# Altium PCB chassisPCB.PcbDoc
Units mil, origin at the board's own origin, x right, y up, seen from the top; angles counter-clockwise.
Board outline 1440 x 1445 mil, 4 copper layers (Top Layer, Layer 1, Layer 2, Bottom Layer), stack 23.712 mil thick; 17 components, 23 nets, 100 pads, 21 vias.
Unrouted connection lines stored in the file: 6.
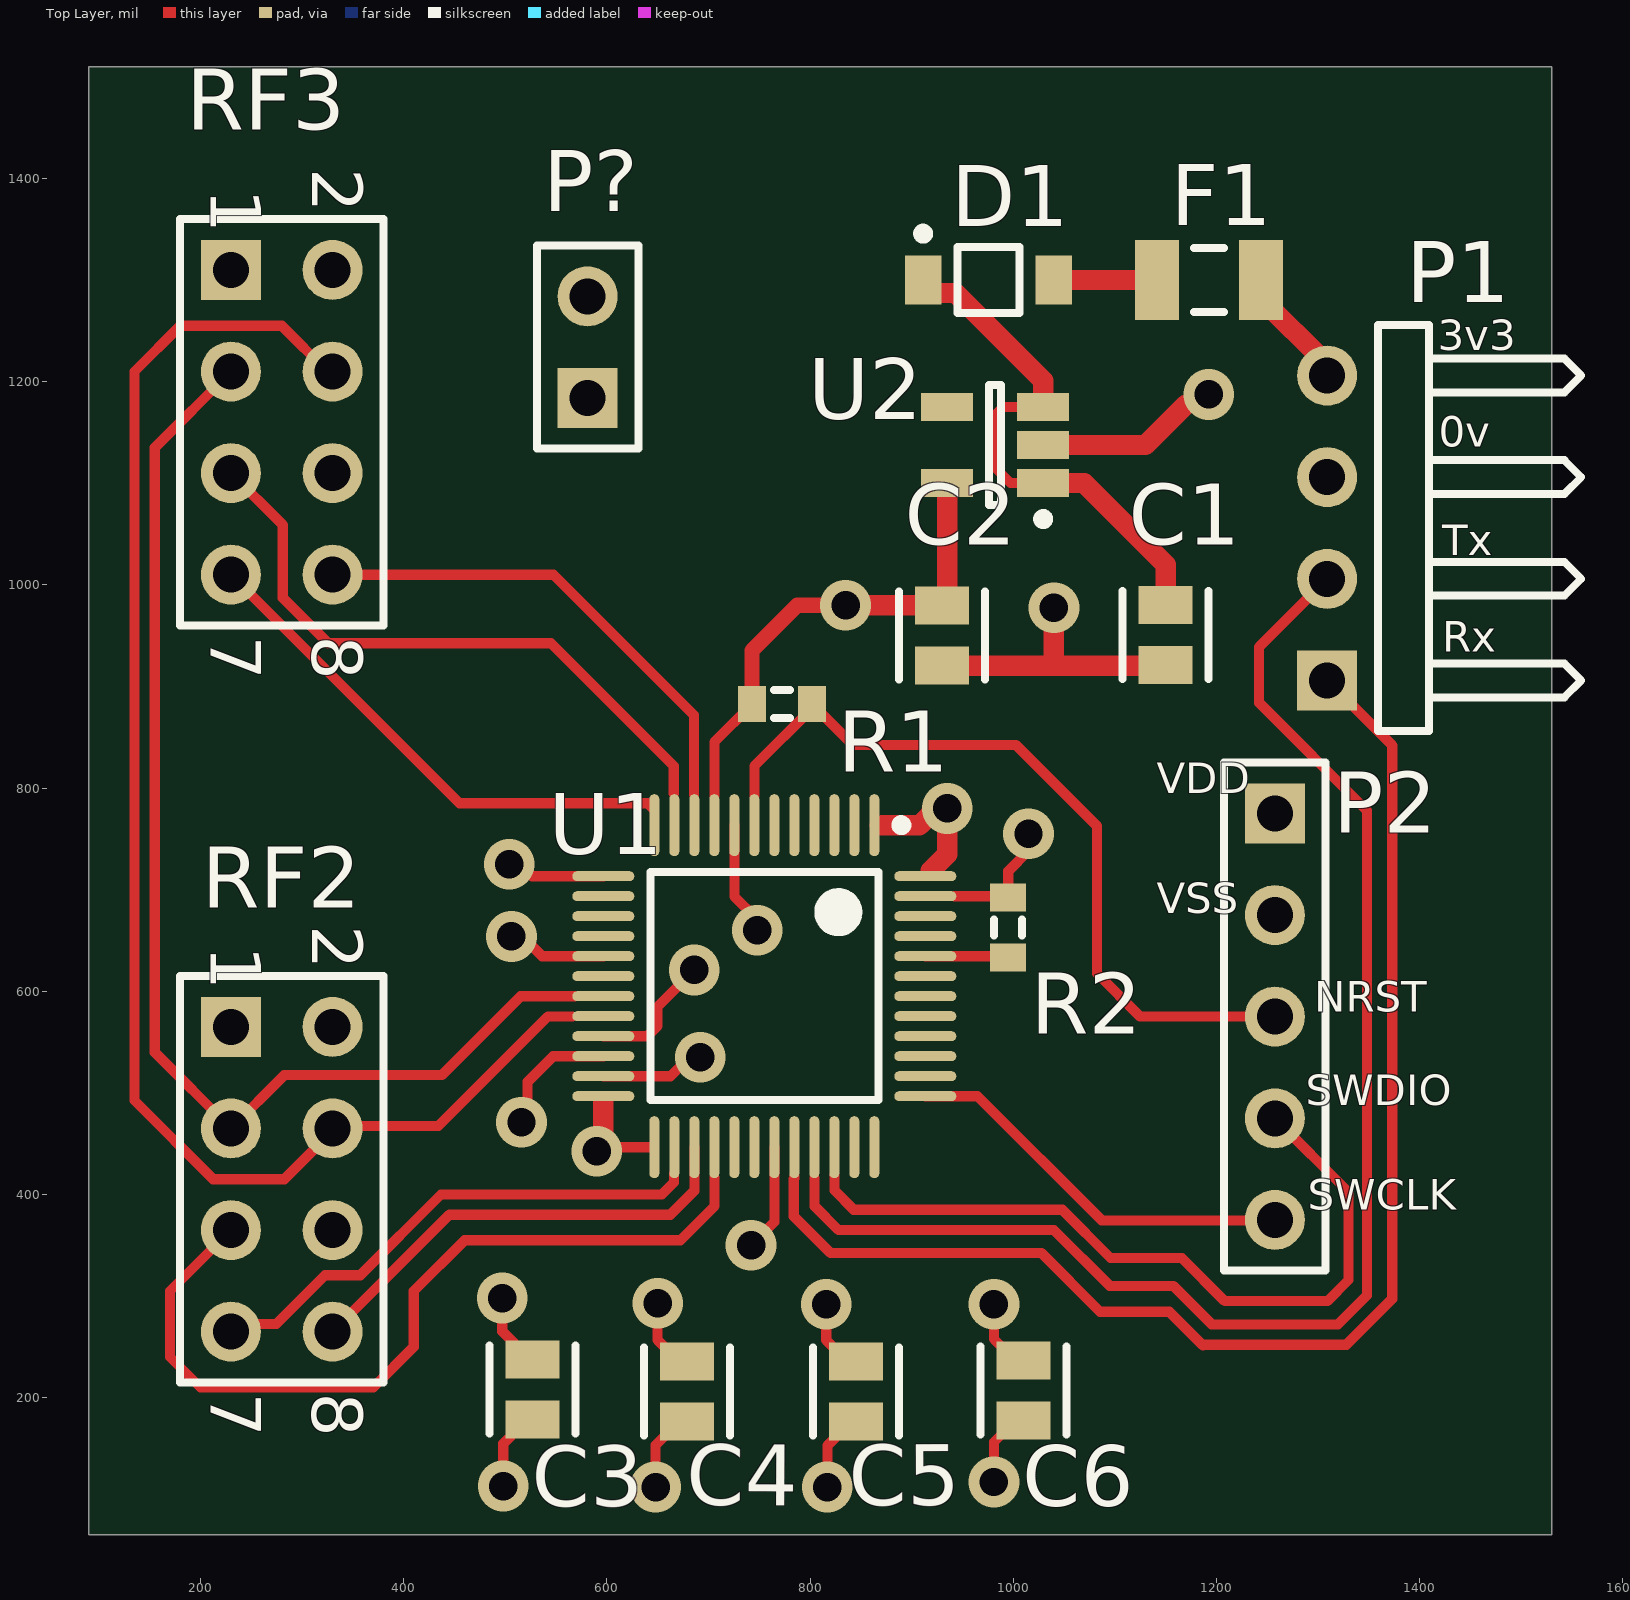
[diagram p0: Top Layer view]
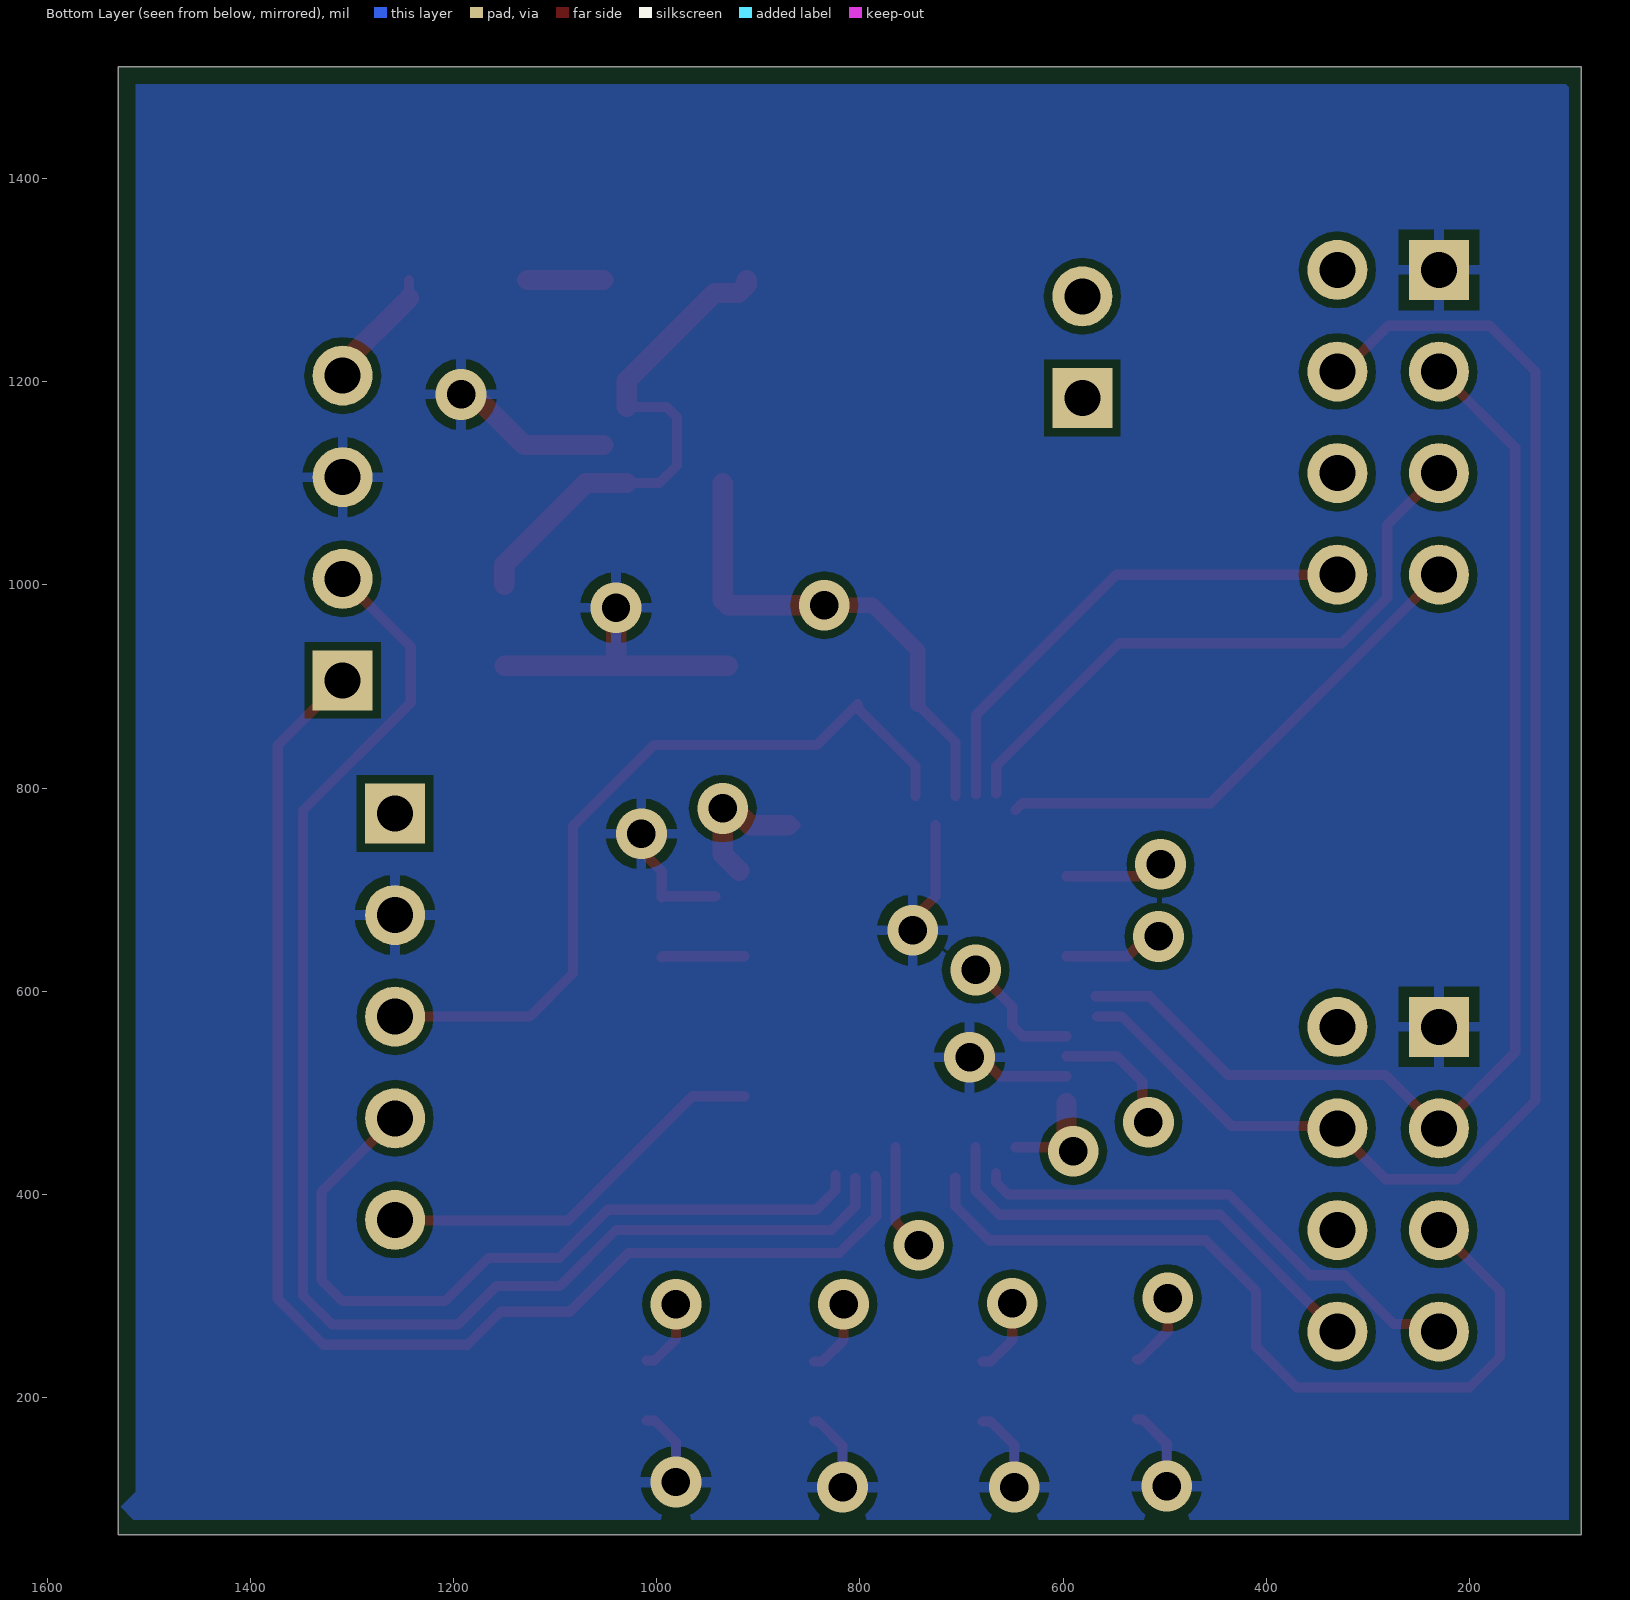
[diagram p1: Bottom Layer view, seen from below]
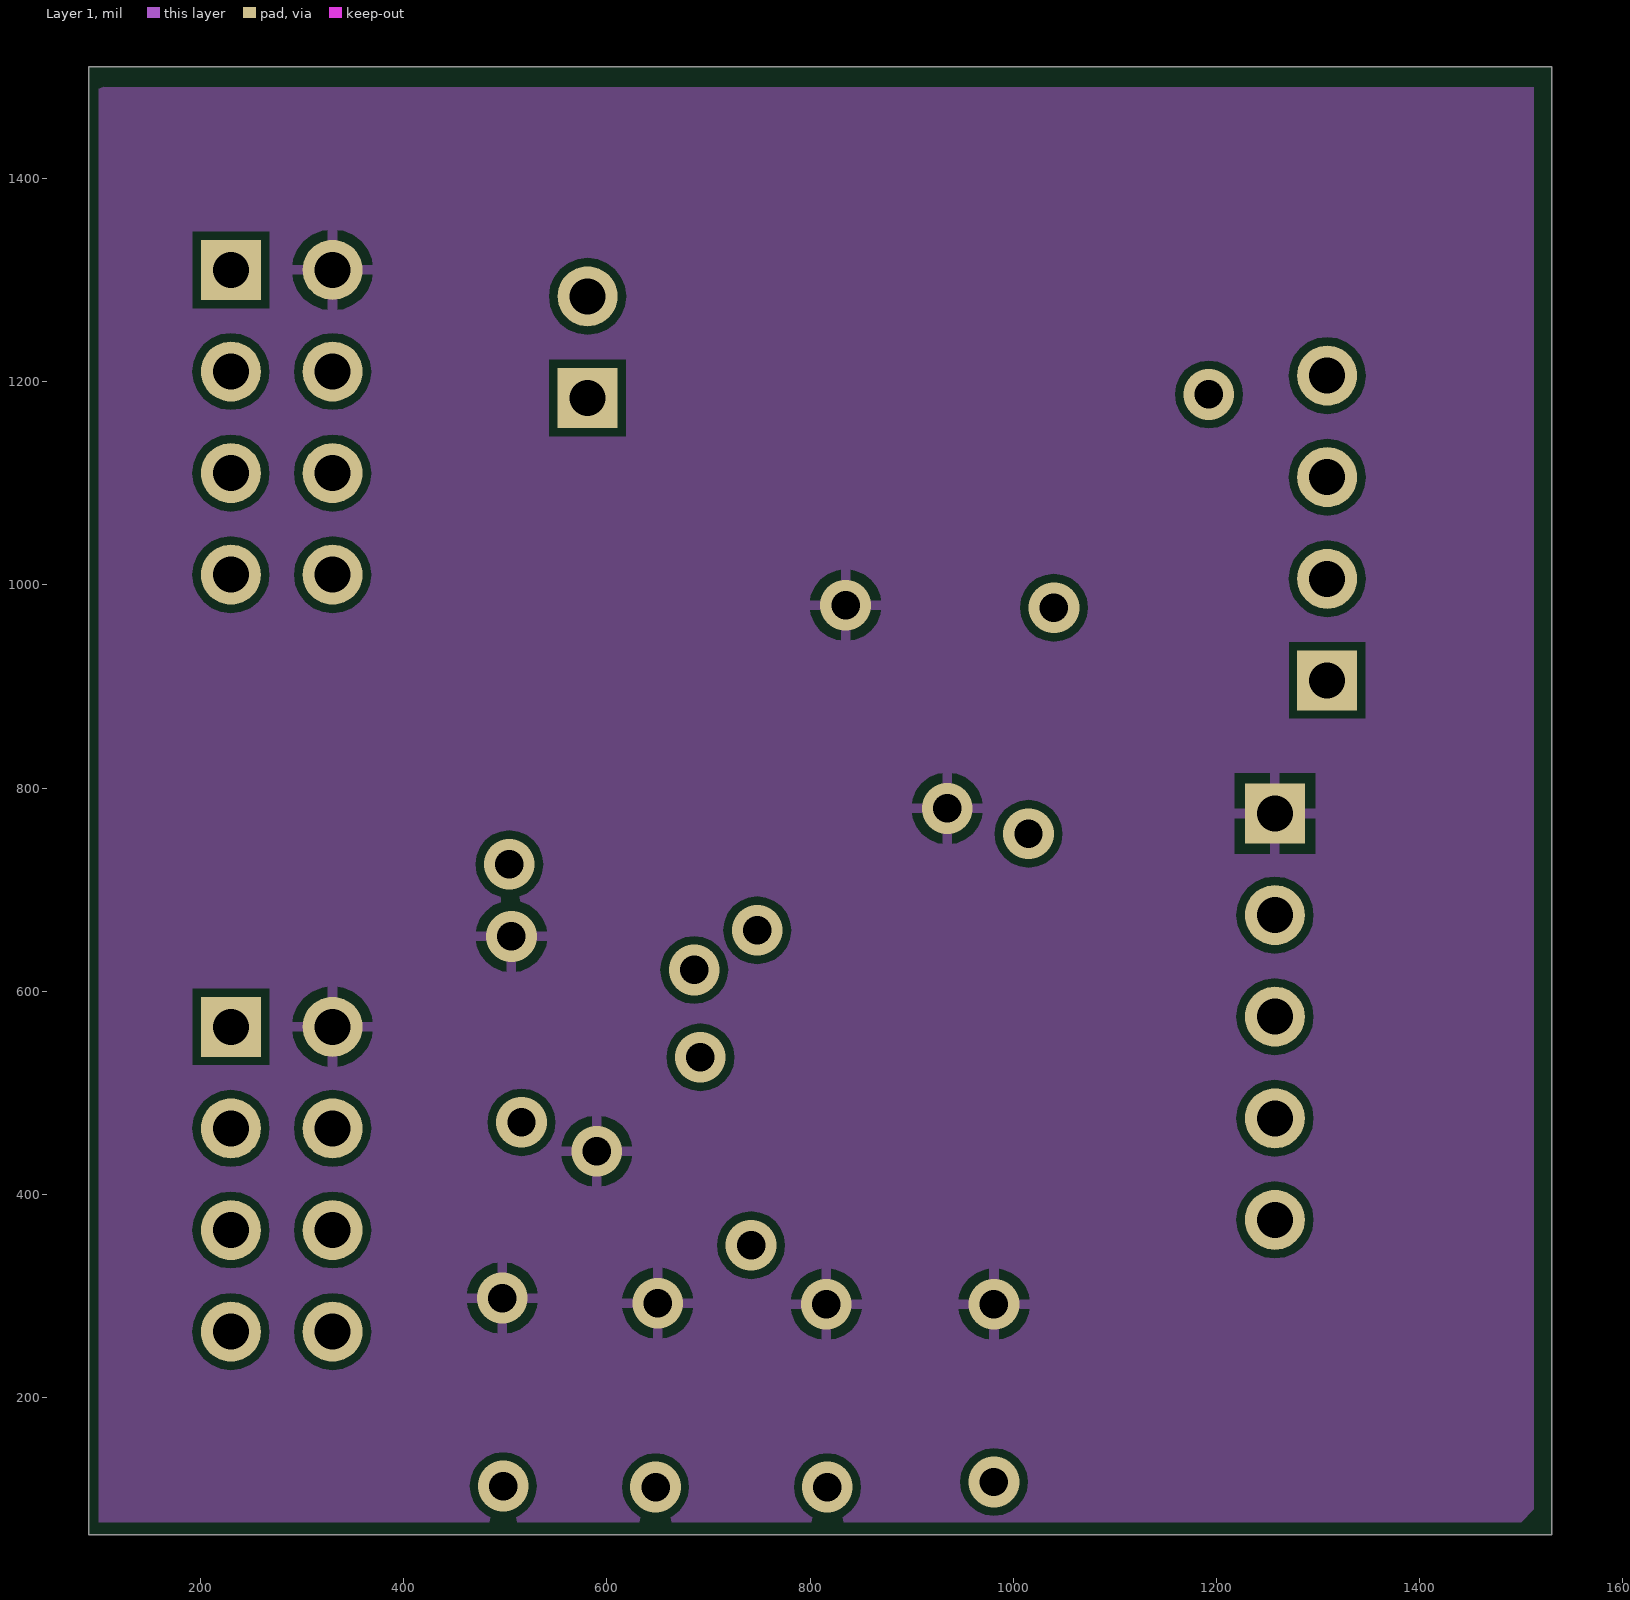
[diagram p2: Layer 1]
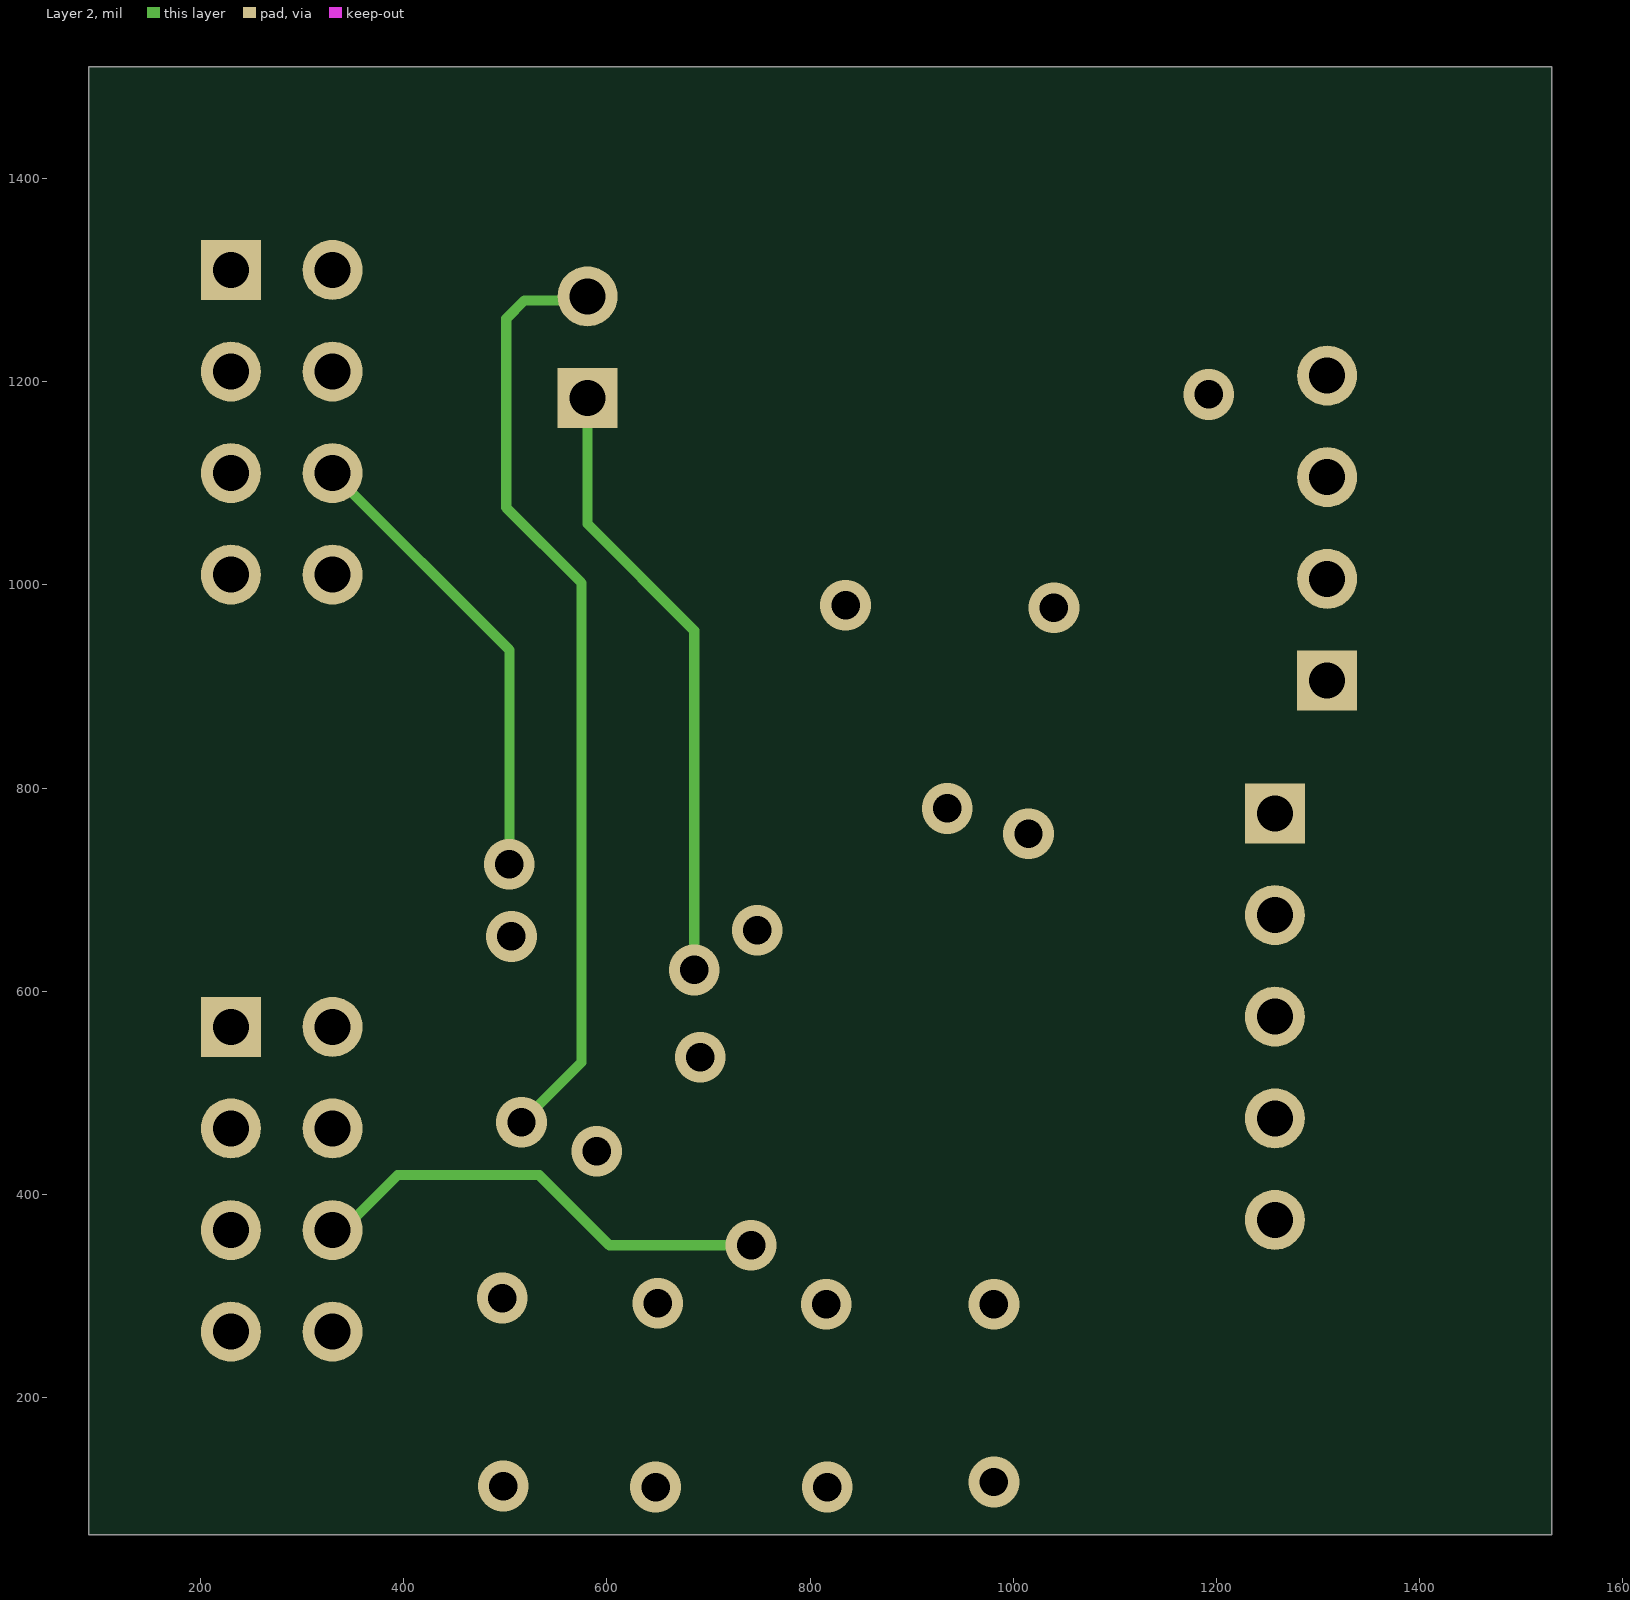
[diagram p3: Layer 2]

## Layer stack, top to bottom
Top Solder: solder mask 0.4, Solder Resist, Dk 3.5
Top Layer: signal copper 1.378
Dielectric 2: prepreg 2.8, PP-006, Dk 4.1
Layer 1: signal copper 1.378
Dielectric 1: dielectric 12.6, FR-4, Dk 4.8
Layer 2: signal copper 1.378
Dielectric 3: prepreg 2.8, PP-006, Dk 4.1
Bottom Layer: signal copper 1.378
Bottom Solder: solder mask 0.4, Solder Resist, Dk 3.5

## Board outline
90,65 1530,65 1530,1510 90,1510

## Design rules (kind name [scope] priority, off if disabled: settings)
Clearance [All] p1: gap=8 ignorepadtopadclearanceinfootprint=TRUE except(0: Arc-Text Arc-Hole Track-Text Track-Hole SMDPad-Text SMDPad-Hole THPad-Text THPad-Hole Via-Text Via-Hole Fill-Text Fill-Hole Poly-Text Poly-Hole Region-Text Region-Hole Text-Text Text-Hole; 7: SMDPad-SMDPad)
MinimumSolderMaskSliver [All] p1: minsoldermaskwidth=5
PolygonConnect [All] p1: connectstyle=Relief reliefconductorwidth=10 reliefentries=4 polygonreliefangle="90 Angle" airgapwidth=10
RoutingVias [All] p1: holewidth=28 width=50 viastyle="Through Hole" minholewidth=28 minwidth=50 maxholewidth=28 maxwidth=50
SilkToSilkClearance [HasFootprint('No Footprint') vs HasFootprint('No Footprint')] p1: silktosilkclearance=0
SilkToSolderMaskClearance [IsPad vs HasFootprint('STM-LQFP48_L')] p1: minsilkscreentomaskgap=10 clearancetoexposedcopper=TRUE
SolderMaskExpansion [All] p1: expansion=2 istentingtop=FALSE
Width [All] p1: maxlimit=20 minlimit=10 preferedwidth=10 midlayer1_maxwidth=10 midlayer2_maxwidth=10 bottomlayer_maxwidth=10 minimp=50.000000 maximp=50.000000 favimp=50.000000
27 further rules are at their usual default settings.

## Components (designator, comment, footprint, x,y, rotation, side; value= is the part's Value field where it differs from the comment)
C1 "1uF" FP-C0805C-DN-MFG 1150,950.47 r270 top value="0.22 μF"
C2 "1uF" FP-C0805C-DN-MFG 930,950 r270 top value="0.22 μF"
C3 "4.7uF" FP-C0805C-DN-MFG 527,208 r270 top value="0.22 μF"
C4 "10nF" FP-C0805C-DN-MFG 679,206 r270 top value="0.22 μF"
C5 "10nF" FP-C0805C-DN-MFG 845,206 r270 top value="0.22 μF"
C6 "10nF" FP-C0805C-DN-MFG 1010,207 r270 top value="0.22 μF"
D1 "MBR120VLSFT1" ONSC-SOD-123FL-2-498-01_V 975.63,1300 r0 top
F1 "3413.0330.22" FP-3413_0330_22-MFG 1192.5,1300 r180 top value=3.5mΩ
P1 "Ext-Con" HDR1X4H 1309,906 r90 top
P2 "Header 5" HDR1X5 1257.5,775 r270 top
P? "Header 2" HDR1X2 581,1184 r90 top
R1 "Res3" J1-0603 772.5,882.5 r0 top value=10k
R2 "Res3" J1-0603 995,662.97 r90 top value=10k
RF2 "nRF24-Con" HDR2X4 230,565 r270 top
RF3 "nR24-Con" HDR2X4 230,1310 r270 top
U1 "STM32F373CCT6" STM-LQFP48_L 755,605 r270 top
U2 "LD39015M33R" SOT23-5L_M 982.24,1137.6 r180 top

## Footprints (in the part's own frame and the unit in brackets; to place one, negate y for a bottom-side part, rotate by r counter-clockwise, add the part's x,y. Pads: shape width x height; smd on the part's side, far side on the other; paste and mask are expansions set on the pad)
FP-3413_0330_22-MFG [mm]
  rect 1.1x2 smd paste+0 mask+0: 1(-1.3,0) 2(1.3,0)
  silkscreen extent -0.38,-0.8 0.38,0.8, body extent -1.95,-1.1 1.95,1.1, height 0.25
FP-C0805C-DN-MFG [mm]
  rect 0.95x1.35 smd paste+0 mask+0: 1(-0.75,0) 2(0.75,0)
  silkscreen extent -1.1,-1.07 1.1,1.07, body extent -1.4,-0.85 1.4,0.85, height 0.25
HDR1X2 [mm] "Connector; Header; 2 Position"
  rect 1.5x1.5 hole 0.9: 1(0,0)
  round 1.5 hole 0.9: 2(2.54,0)
  silkscreen extent -1.27,-1.27 3.81,1.27
HDR1X4H [mm] "Connector; Header; 4 Position; Right Angle"
  rect 1.5x1.5 hole 0.9: 1(0,0)
  round 1.5 hole 0.9: 2(2.54,0) 3(5.08,0) 4(7.62,0)
  silkscreen extent -1.27,-6.35 8.89,-1.27
HDR1X5 [mm] "Connector; Header; 5 Position"
  rect 1.5x1.5 hole 0.9: 1(0,0)
  round 1.5 hole 0.9: 2(2.54,0) 3(5.08,0) 4(7.62,0) 5(10.16,0)
  silkscreen extent -1.27,-1.27 11.43,1.27
HDR2X4 [mm] "Connector; Header; 4x2 Position"
  rect 1.5x1.5 hole 0.9: 1(0,0)
  round 1.5 hole 0.9: 2(0,2.54) 3(2.54,0) 4(2.54,2.54) 5(5.08,0) 6(5.08,2.54) 7(7.62,0) 8(7.62,2.54)
  silkscreen extent -1.27,-1.27 8.89,3.81
J1-0603 [mm] "Chip Resistor, Body 1.6x0.8mm, IPC High Density"
  rect 0.7x0.9 smd: 1(-0.75,0) 2(0.75,0)
  silkscreen extent -0.2,-0.35 0.2,0.35, body extent -0.85,-0.48 0.85,0.48, height 0.9
ONSC-SOD-123FL-2-498-01_V [mm] "SOD, 2-Leads, Body 2.7x1.65mm"
  rect 0.91x1.22 smd: 1(-1.635,0) 2(1.635,0)
  silkscreen extent -1.76,-0.82 0.78,1.28, body extent -1.35,-0.82 1.35,0.82, height 1
SOT23-5L_M [mm] "SOT23, 5-Leads, Body 2.9x1.6mm, Pitch 0.95mm, Lead Span 2.8mm, IPC Low Density"
  rect 1.3x0.7 smd: 1(-1.2,0.95) 2(-1.2,0) 3(-1.2,-0.95) 4(1.2,-0.95) 5(1.2,0.95)
  silkscreen extent -1.33,-1.5 0.15,1.97, body extent -0.87,-1.5 0.87,1.5, height 1.45
STM-LQFP48_L [mm] "QFP, 48-Leads, Body 7x7mm, Pitch 0.5mm, IPC High Density"
  oval 1.55x0.25 smd: 1(-4.025,2.75) 2(-4.025,2.25) 3(-4.025,1.75) 4(-4.025,1.25) 5(-4.025,0.75) 6(-4.025,0.25) 7(-4.025,-0.25) 8(-4.025,-0.75) 9(-4.025,-1.25) 10(-4.025,-1.75) 11(-4.025,-2.25) 12(-4.025,-2.75) 25(4.025,-2.75) 26(4.025,-2.25) 27(4.025,-1.75) 28(4.025,-1.25) 29(4.025,-0.75) 30(4.025,-0.25) 31(4.025,0.25) 32(4.025,0.75) 33(4.025,1.25) 35(4.025,2.25) 36(4.025,2.75) ""(4.025,1.75)
  oval 0.25x1.55 smd: 13(-2.75,-4.025) 14(-2.25,-4.025) 15(-1.75,-4.025) 16(-1.25,-4.025) 17(-0.75,-4.025) 18(-0.25,-4.025) 19(0.25,-4.025) 20(0.75,-4.025) 21(1.25,-4.025) 22(1.75,-4.025) 23(2.25,-4.025) 24(2.75,-4.025) 37(2.75,4.025) 38(2.25,4.025) 39(1.75,4.025) 40(1.25,4.025) 41(0.75,4.025) 42(0.25,4.025) 43(-0.25,4.025) 44(-0.75,4.025) 45(-1.25,4.025) 46(-1.75,4.025) 47(-2.25,4.025) 48(-2.75,4.025)
  silkscreen extent -4.15,-2.85 2.85,3.55, body extent -3.5,-3.5 3.5,3.5, height 1.6

## Part data
C1 C2 C3 C4 C5 C6: library part CMP-1036-04552-2, "CAP CER 0.22UF 50V X7R 0805", Capacitance="0.22 μF", Manufacturer=KEMET, Manufacturer Part Number=C0805C224K5RACTU, Package=C0805C-DN, Temperature="-55°C to +125°C", Temperature Characteristic=X7R, Temperature Coefficient=30ppm/°C, Temperature Range High=+125°C, Temperature Range Low=-55°C, Tolerance=0.1, Voltage Rating="50 V", Automotive=No, Category=Cap, ComponentLink2Description=Datasheet, ComponentLink2URL=https://content.kemet.com/datasheets/KEM_C1003_C0G_SMD.pdf, Device Class L1="Passive Components", Device Class L2=Capacitors, Device Class L3="Ceramic Capacitors", Digikey Description="CAP CER 0.22UF 50V X7R 0805", Height=0.88mm, Ipc Land Pattern Name=CAPC200125X78, Lead Free=Yes, Material=Ceramic, Mouser Description="CAP CER 0.22UF 50V X7R 0805", Octopart=https://octopart.com/c0805c224k5ractu-kemet-144670, RoHS=TRUE
D1: library part CMP-1055-00448-1, "Schottky Power Rectifier, 2-Pin SOD-123, Tape and Reel", Manufacturer="On Semiconductor", ComponentLink1Description="Manufacturer URL", ComponentLink1URL=http://www.onsemi.com/, ComponentLink2Description=Datasheet, ComponentLink2URL=http://www.onsemi.cn/pub_link/Collateral/MBR120VLSFT1-D.PDF, ComponentLink3Description="Package Specification", ComponentLink3URL=http://www.onsemi.cn/pub_link/Collateral/MBR120VLSFT1-D.PDF, Configuration=Single, DatasheetVersion="Rev. 2", IFSM Max (A)=45, Mounting Technology="Surface Mount", PackageDescription="2-Pin SOD, Body 1.65 x 2.7 mm", PackageReference=SOD-123FL-2-498-01, PackageVersion="Rev. A", Packing="Tape and Reel", PartNumber=MBR120VLSFT1, RoHS=FALSE
F1: library part CMP-26293-000001-1, "FUSE BOARD MNT 15A 32VAC 63VDC", Ambient Temperature Range High=+90°C, Ambient Temperature Range Low=-55°C, Fuse Current=15A, Fuse Interrupt Dc Current=100A, Fuse Voltage Drop=57mV, Manufacturer="Schurter Inc", Max Fuse Ac Voltage=32V, Max Fuse Dc Voltage=63V, Package=0, Resistance=3.5mΩ, Automotive=No, Category=Fuse, ComponentLink2Description=Datasheet, ComponentLink2URL=https://us.schurter.com/en/datasheet/typ_UST_1206.pdf, Device Class L1="Circuit Protection", Device Class L2=Fuses, Device Class L3=unset, Digikey Description="FUSE BOARD MNT 15A 32VAC 63VDC", Fuse Blow Speed=Slow, Fuse I2T=65A2Sec, Height=0.6mm, Ipc Land Pattern Name=CAPC320160X60, Lead Free=Yes, Manufacturer Part Number=3413.0330.22, Mouser Description="Surface Mount Fuses UST 1206 FUSE 15A F", Octopart=https://octopart.com/3413.0330.22-schurter-8400836, RoHS=TRUE, Voltage Rating=63V
P1: library part "Header 4H", "Header, 4-Pin, Right Angle", LatestRevisionDate=17-Jul-2002, LatestRevisionNote="Re-released for DXP Platform.", Publisher="Altium Limited"
P2: "Header, 5-Pin", LatestRevisionDate=17-Jul-2002, LatestRevisionNote="Re-released for DXP Platform.", Publisher="Altium Limited"
P?: "Header, 2-Pin", LatestRevisionDate=17-Jul-2002, LatestRevisionNote="Re-released for DXP Platform.", Publisher="Altium Limited"
R1 R2: "Resistor", LatestRevisionDate=29-May-2009, LatestRevisionNote="IPC-7351 Footprint Added.", PackageDescription="Chip Resistor", PackageReference=J1-0603, Published=8-Jun-2000, Publisher="Altium Limited"
RF2 RF3: library part "Header 4X2", "Header, 4-Pin, Dual row", LatestRevisionDate=17-Jul-2002, LatestRevisionNote="Re-released for DXP Platform.", Publisher="Altium Limited"
U1: library part CMP-0572-00021-2, "ARM Cortex-M4 32-bit MCU, 256 KB Flash, 32 KB Internal RAM, 36 I/Os, 48-pin LQFP, -40 to 85 degC, Tray", I/Os (High Current)=36, Operating Frequency(F) (Processor speed) (MHz)=72, Supply Voltage(Vcc) min (V)=2, ComponentLink1Description="Manufacturer URL", ComponentLink1URL=http://www.st.com/web/en/home.html, ComponentLink2Description=Datasheet, ComponentLink2URL=http://www.st.com/st-web-ui/static/active/en/resource/technical/document/datasheet/DM00046749.pdf, ComponentLink3Description="Package Specification", ComponentLink3URL=http://www.st.com/st-web-ui/static/active/en/resource/technical/document/datasheet/DM00058181.pdf, Core="ARM Cortex-M4", DatasheetVersion="Rev. 3", FLASH Size (Prog) (kB)=256, Internal RAM Size (kB)=32, Mounting Technology="Surface Mount", PackageDescription="48-Pin Low Profile Quad Flat Package, 7 x 7 mm Body, 0.5 mm Pitch", PackageReference=LQFP48, PackageVersion="Rev. 6, 06/2013", Packing=Tray, PartNumber=STM32F373CCT6
U2: library part CMP-0244-00351-1, "150 mA Low Quiescent Current Low Noise Voltage Regulator, 3.3V, 5-Pin SOT-23, Tape and Reel", ComponentLink1Description="Manufacturer URL", ComponentLink1URL=http://www.st.com, ComponentLink2Description=Datasheet, ComponentLink2URL=http://www.st.com/internet/com/TECHNICAL_RESOURCES/TECHNICAL_LITERATURE/DATASHEET/CD00173477.pdf, DatasheetVersion=1/02/2009, PackageDescription="5-Pin SOT-23 Package, 2.9 x 1.6 mm Body, 0.95 mm Pitch, 2.8 mm Lead Span", PackageReference=SOT23-5L, PackageVersion=1/01/2008

## Via types
v1: diameter 50, hole 28, Top Layer to Bottom Layer, 21 vias

## Nets (pads, with @x,y where several pads share a name; then routed paths per layer and width w, separated by ;. In a path a pad name is that pad's centre, name@x,y a point inside that pad or via, vN(x,y) a via of type N, cw(c..) or ccw(c..) an arc to the next point about the centre after c; other vN are vias at no path point)
GND: C1.2 C2.2 C3.2 C4.2 C5.2 C6.2 P1.3 P2.2 R2.2 RF2.1 RF3.1 U1.8 U1.23 U1.47 U2.2 | length 1069.6
  Top Layer w10: v1(498,113) 498,154.77 521.7,178.47 C3.2 ; U1.23 662.59,516.42 681.18,535 v1(692,535) ; v1(648,112) 648,153.35 671.13,176.47 C4.2 ; U1.8 725.47,693.35 748,670.82 v1(748,660) ; v1(817,112) 817,152.77 840.7,176.47 C5.2 ; U1.47@942.11,693.58 993.92,693.58 R2.2 995,718.16 1015,738.16 v1(1015,755) ; v1(981,117) 981,156.35 1002.13,177.47 C6.2 ; v1@1039.76,977.26 v1(1040,977.5) ; C1.2@1149.53,920.47 C1.2
  Top Layer w20: C2.2 1039.76,920.47 ; v1@1039.76,977.26 1039.76,920.47 ; U2.2@1052.5,1137.6 1130.1,1137.6 v1@1170,1177.5 ; C1.2@1149.53,920.47 1039.76,920.47
  other v1: 1192.5,1187.5
NetC1_1: C1.1 D1.1 U2.1 U2.3 | length 519.4
  Top Layer w10: U2.1 997.3,1100.2 980,1117.5 980,1165 990,1175 U2.3
  Top Layer w20: D1.1 911.26,1295.23 919.17,1287.31 942.93,1287.31 1029.49,1200.75 U2.3 ; U2.1 1069.8,1100.2 1150,1020 1150,1000
NetD1_2: D1.2 F1.2 | length 75
  Top Layer w20: D1.2@1052.5,1300 F1.2@1127.5,1300
NetF1_1: F1.1 P1.4 | length 121.1
  Top Layer w10: F1.1@1243.68,1282.28 F1.1 ; P1.4 P1.4@1309,1216.96
  Top Layer w20: F1.1@1243.68,1282.28 P1.4@1309,1216.96
NetP1_1: P1.1 U1.32 | length 1335.4
  Top Layer w10: U1.32@784.53,417.89 784.53,415.7 783.87,415.04 783.87,378.63 820,342.5 1027.5,342.5 1085.39,284.61 1153.68,284.61 1186.64,251.64 1187.11,252.11 1327.89,252.11 1373,297.22 1373,842 P1.1
NetP1_2: P1.2 U1.33 | length 1408.5
  Top Layer w10: U1.33@804.53,416.29 804.53,388.31 827.84,365 1040,365 1095,310 1157.5,310 1195.39,272.11 1319.61,272.11 1348,300.5 1348,778 1242,884 1242,939 P1.2
NetP2_3: P2.3 R1.2 U1.7 | length 781.7
  Top Layer w10: U1.7@745.16,792.11 745.16,821.69 802.03,878.56 R1.2 842.03,842.5 1002.5,842.5 1082.5,762.5 1082.5,617.5 1125,575 P2.3
NetP2_4: P2.4 U1. | length 764
  Top Layer w10: U1.@824,419 824,404.02 843.02,385 1048.28,385 1095.78,337.5 1165.78,337.5 1208.28,295 1309.22,295 1330,315.78 1330,402.5 P2.4
NetP2_5: P2.5 U1.37 | length 394.8
  Top Layer w10: U1.37 964.84,496.73 1087.03,374.53 1257.03,374.53 P2.5
NetP?_1: P?.1 U1.21 | length 734.1
  Top Layer w10: U1.21 639.79,555.79 650,566 650,585 v1(686,621)
  Layer 2 w10: P?.1 581,1060 686,955 v1(686,621)
NetP?_2: P?.2 U1.22 | length 1062.6
  Top Layer w10: v1(516,471) 522,477 522,511 547.1,536.1 U1.22
  Layer 2 w10: v1(516,471) 575,530 575,1002 501,1076 501,1262 519,1280 577,1280 P?.2
NetR2_1: R2.1 U1.44 | length 82.3
  Top Layer w10: U1.44@913.7,634.76 U1.44 913.54,634.45 994,634.45 R2.1
NetRF2_3: RF2.3 RF3.3 U1.19 | length 1198.9
  Top Layer w10: RF3.3 155,1135 155,540 RF2.3 282.5,517.5 437.5,517.5 515.16,595.16 U1.19@567.89,595.16
NetRF2_4: RF2.4 RF3.4 U1.20 | length 1430.2
  Top Layer w10: RF2.4@312.5,445 282.5,415 212.5,415 135,492.5 135,1210 180,1255 280,1255 325,1210 RF3.4 ; RF2.4@352.5,467.5 434.32,467.5 541.97,575.16 U1.20@566.29,575.16
NetRF2_5: RF2.5 U1.28 | length 832.6
  Top Layer w10: RF2.5 170,305 170,240 200,210 370,210 410,250 410,305 460,355 672.5,355 706.1,388.6 U1.28@706.1,416.63
NetRF2_6: RF2.6 U1.31 | length 573.9
  Top Layer w10: RF2.6 RF2.6@335,365 ; v1(742,350) 764.84,372.84 U1.31
  Layer 2 w10: RF2.6 340,365 394,419 533.5,419 602.5,350 v1(742,350)
NetRF2_7: RF2.7 U1.26 | length 505.9
  Top Layer w10: RF2.7 237.5,272.5 274.53,272.5 322.5,320.47 357.19,320.47 436.72,400 653.96,400 666,412.04 U1.26@666,421
NetRF2_8: RF2.8 U1.27 | length 456.4
  Top Layer w10: RF2.8 445,380 662.5,380 686.1,403.6 U1.27
NetRF3_5: RF3.5 U1.11 | length 624.1
  Top Layer w10: RF3.5 280.94,1059.06 280.94,987.34 325.78,942.5 545,942.5 665.79,821.71 665.79,794.87
NetRF3_6: RF3.6 U1.13 | length 554.5
  Top Layer w10: v1(504,725) 514.82,725 526.56,713.27 U1.13
  Layer 2 w10: RF3.6 504,936 v1(504,725)
NetRF3_7: RF3.7 U1.12 | length 512.4
  Top Layer w10: RF3.7 455,785 640,785 U1.12@646.5,778.5
NetRF3_8: RF3.8 U1.10 | length 491.1
  Top Layer w10: RF3.8 547.5,1010 685.79,871.71 U1.10@685.79,793.71
VCC: C2.1 C3.1 C4.1 C5.1 C6.1 P2.1 R1.1 RF2.2 RF3.2 U1.1 U1.9 U1.17 U1.24 U1.25 U1.48 U2.5 | length 1116.9
  Top Layer w10: v1(497,298) 497,265.23 524.7,237.53 C3.1 ; v1(506,654) 516.82,654 536.3,634.53 U1.17 ; v1(590,442.5) 594.04,446.54 U1.25@646.5,446.54 ; v1(650,293) 650,256.65 671.13,235.53 C4.1 ; U1.9@705.79,792.11 705.79,845.32 R1.1 ; v1(816,292) 816,256.65 837.13,235.53 C5.1 ; U1.1 U1.1@863.35,763.54 ; v1@924.18,780 v1(935,780) ; C2.1@929.53,980 C2.1 C2.1@935,984.53 ; v1(981,292) 981,257.65 1002.13,236.53 C6.1
  Top Layer w15: R1.1 742.97,935.47 787.5,980 v1(835,980)
  Top Layer w20: v1@596.54,450 596.54,490 ; v1(835,980) C2.1@929.53,980 ; 870.5,763.54 907.72,763.54 v1@924.18,780 ; 918.75,718.75 935,735 v1(935,780) ; C2.1@935,984.53 U2.5
pads on no net: U1.2 U1.3 U1.4 U1.5 U1.6 U1.14 U1.15 U1.16 U1.18 U1.29 U1.30 U1.35 U1.36 U1.38 U1.39 U1.40 U1.41 U1.42 U1.43 U1.45 U1.46 U2.4

## Polygon pours and split planes (outlines as drawn)
GND on Bottom Layer "GND_L04_P001" (solid, pour order 1): 102.5,1497.5 107.5,1492.5 1512.5,1492.5 1512.5,107.5 1527.5,92.5 1515,80 102.5,80 102.5,1490 105,1492.5
VCC on Layer 1 "VCC_L02_P002" (solid, pour order 2): 100,1495 105,1490 1512.5,1490 1512.5,90 1500,77.5 100,77.5

## Silkscreen, mask and mechanical layers (free items; w line width, h text height)
Top Overlay:
  text "3v3" at 1418,1231 h30
  text "0v" at 1419,1136 h30
  text "Tx" at 1422,1029 h30
  text "Rx" at 1422,934 h30
  text "VDD" at 1141,795 h30
  text "VSS" at 1141,677 h30
  text "NRST" at 1296,580 h30
  text "SWDIO" at 1288,488 h30
  text "SWCLK" at 1290,385 h30

## Text inside footprints (layer, text, board x,y; h text height)
RF2: Top Overlay "2" at 310,665 h50 r270; Top Overlay "1" at 210,645 h50 r270; Top Overlay "7" at 210,205 h50 r270; Top Overlay "8" at 310,205 h50 r270
RF3: Top Overlay "2" at 310,1410 h50 r270; Top Overlay "1" at 210,1390 h50 r270; Top Overlay "7" at 210,950 h50 r270; Top Overlay "8" at 310,950 h50 r270